# Altium PCB USB-to-UART.PcbDoc
Units mm, origin at the board's own origin, x right, y up, seen from the top; angles counter-clockwise.
Board outline 56.57 x 20 mm, 2 copper layers (Top Layer, Bottom Layer); 24 components, 23 nets, 82 pads, 10 vias.
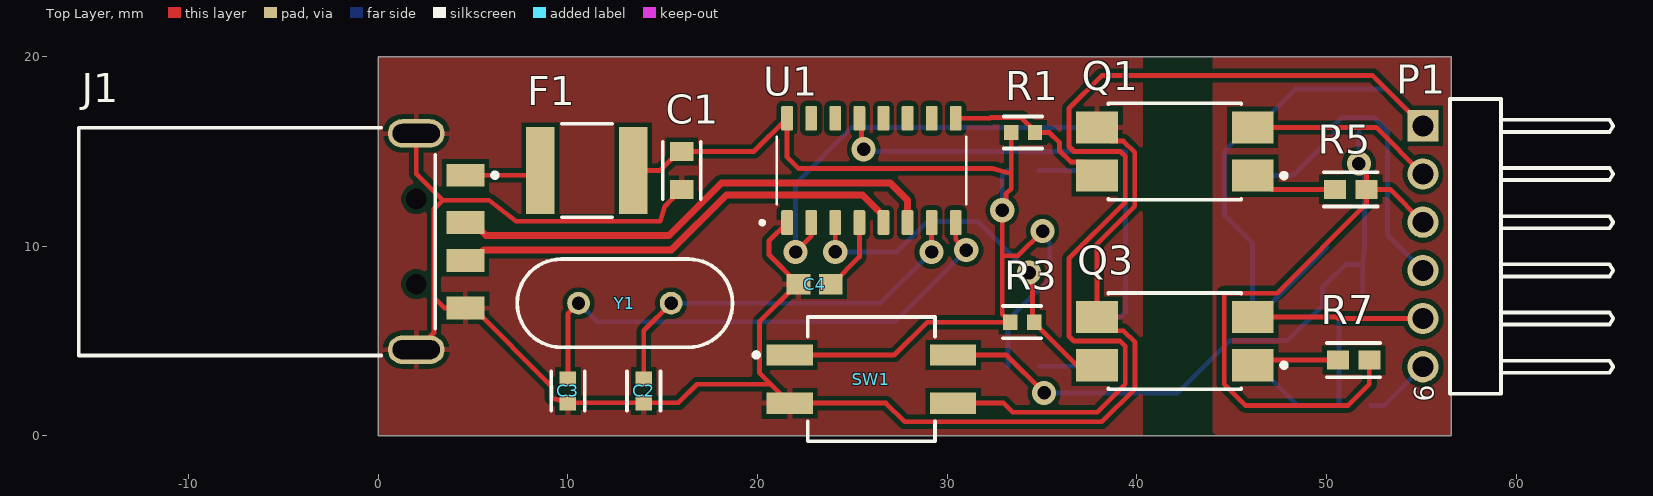
[diagram p0: Top Layer view]
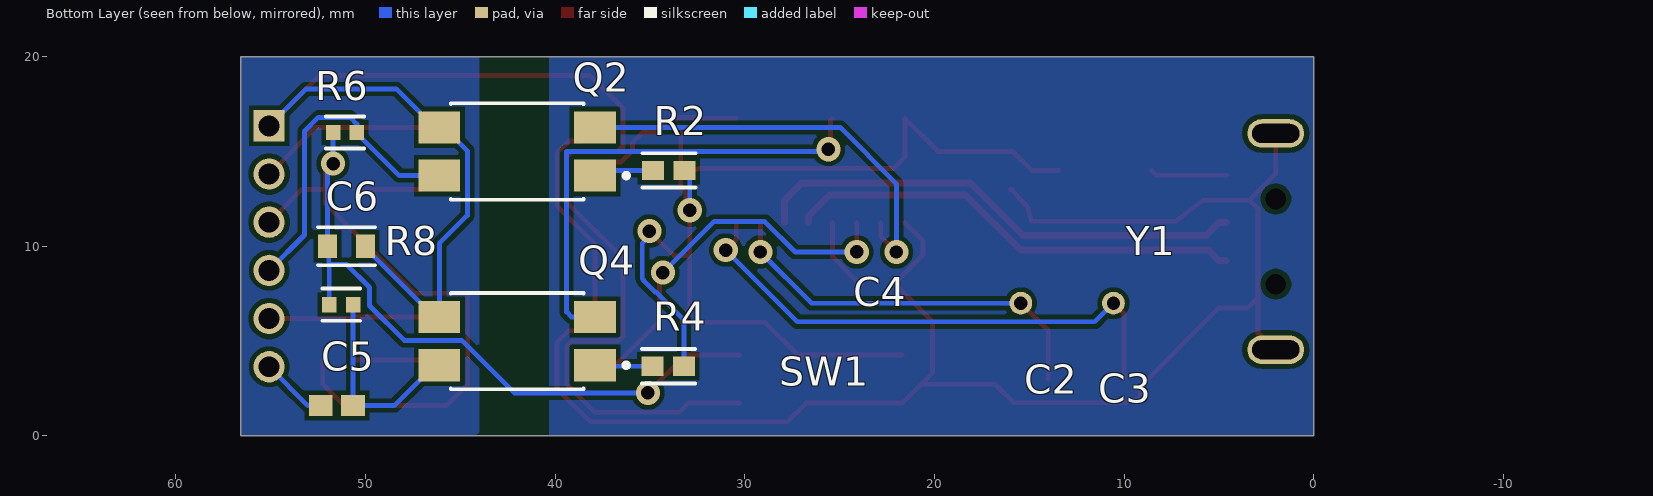
[diagram p1: Bottom Layer view, seen from below]
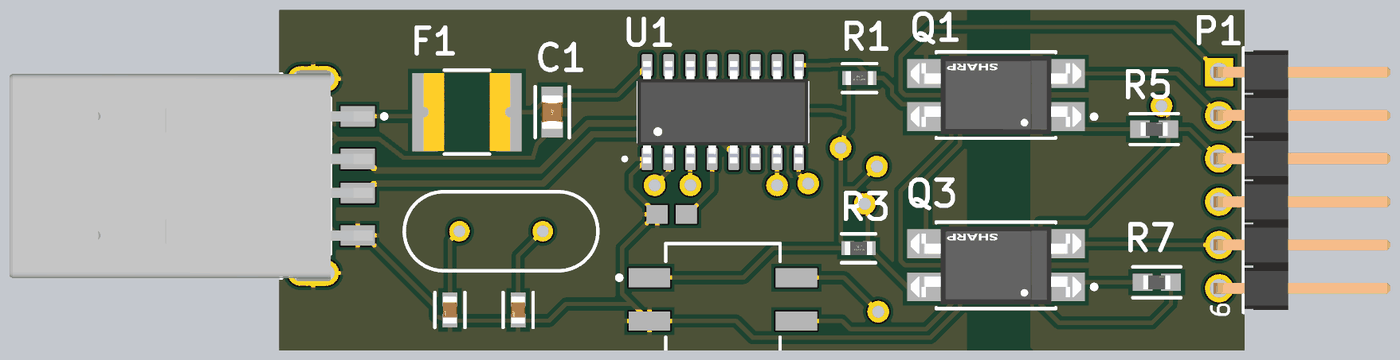
[diagram p2: 3D render of the assembled board from above, using the file's embedded part models]
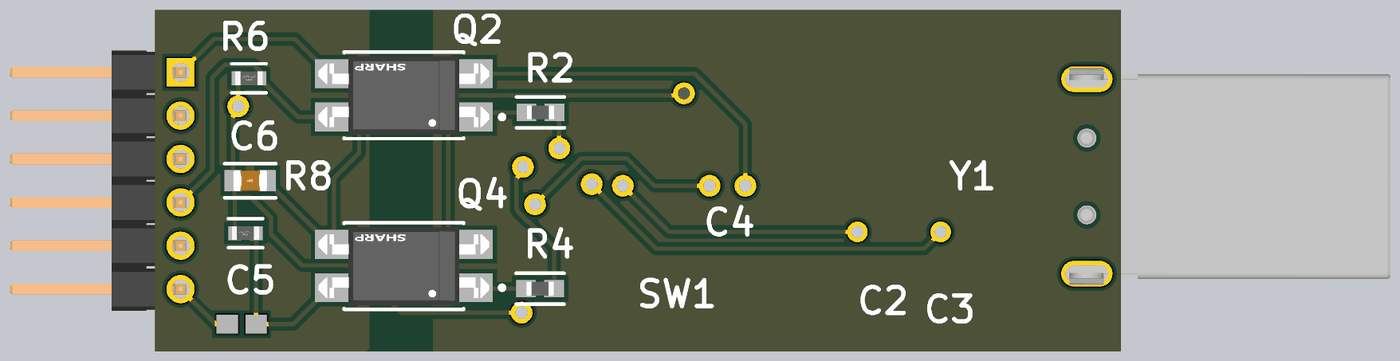
[diagram p3: 3D render of the assembled board from below, using the file's embedded part models]

## Layer stack, top to bottom
Top Solder: solder mask 0.0102, Solder Resist, Dk 3.5
Top Layer: signal copper 0.0356
Dielectric 1: dielectric 0.32, FR-4, Dk 4.8
Bottom Layer: signal copper 0.0356
Bottom Solder: solder mask 0.0102, Solder Resist, Dk 3.5

## Board outline
0,0 56.575,0 56.575,20 0,20

## Design rules (kind name [scope] priority, off if disabled: settings)
Clearance [All] p1: gap=0.254 ignorepadtopadclearanceinfootprint=FALSE except(0: Arc-Hole Track-Hole SMDPad-Hole THPad-Hole Via-Hole Fill-Hole Poly-Hole Region-Hole Text-Hole)
DiffPairsRouting [All] p1: maxlimit=0.254 minlimit=0.254 mostfreqgap=0.254 toplayer_minwidth=0.381 toplayer_maxwidth=0.381 toplayer_prefwidth=0.381 bottomlayer_minwidth=0.381 bottomlayer_maxwidth=0.381 bottomlayer_prefwidth=0.381 maxuncoupledlength=12.7
PolygonConnect [All] p1: connectstyle=Relief reliefconductorwidth=0.254 reliefentries=4 polygonreliefangle="90 Angle" airgapwidth=0.254
RoutingVias [All] p1: holewidth=0.711 width=1.27 viastyle="Through Hole" minholewidth=0.711 minwidth=1.27 maxholewidth=0.711 maxwidth=1.27
SolderMaskExpansion [All] p1: expansion=0.102 istentingtop=FALSE
UnRoutedNet [All] p1: checkbadconnections=TRUE
Width [All] p1: maxlimit=0.254 minlimit=0.254 preferedwidth=0.254
28 further rules are at their usual default settings.

## Classes and differential pairs
differential pair class DIFF_USB: USB_D
differential pair USB_D: +USB_D_P -USB_D_N

## Components (designator, comment, footprint, x,y, rotation, side; value= is the part's Value field where it differs from the comment)
C1 "10uf" FP-0805P-MFG 16,14 r270 top
C2 "22p" FP-0603-L_1_6_0_15-W_0_81-IPC_C 14,2.374 r270 top
C3 "22p" FP-0603-L_1_6_0_15-W_0_81-IPC_C 10,2.374 r270 top
C4 "10n" CAPC1608X90X35ML15T15 23,8 r180 top
C5 "100n" CAPC1608X90X35ML15T15 51.5,1.6 r0 bottom
C6 "10u" FP-0805P-MFG 51,10 r0 bottom
F1 "MF-SMDF050-2" FP-MF-SMDF-MFG 11,14 r0 top value=0.2-1Ω
J1 "480-37-1000" MOLX-480-37-1000_V 3.3,10.25 r270 top
P1 "61300611021" 61300611021 57.85,10 r90 top
Q1 "PC817XNNIP0F" FP-PC817XNNIP0F-MFG 42,15 r180 top
Q2 "PC817XNNIP0F" FP-PC817XNNIP0F-MFG 42,15 r0 bottom
Q3 "PC817XNNIP0F" FP-PC817XNNIP0F-MFG 42,5 r180 top
Q4 "PC817XNNIP0F" FP-PC817XNNIP0F-MFG 42,5 r0 bottom
R1 "10k" FP-CRGP0603-IPC_C 34,16 r0 top value=10KΩ
R2 "510" FP-CR0603-IPC_A 34,14 r0 bottom
R3 "10k" FP-CRGP0603-IPC_C 33.95,6 r0 top value=10KΩ
R4 "510" FP-CR0603-IPC_A 34.025,3.675 r0 bottom
R5 "510" FP-CR0603-IPC_A 51.275,13 r0 top
R6 "10k" FP-CRGP0603-IPC_C 51.075,16 r0 bottom value=10KΩ
R7 "510" FP-CR0603-IPC_A 51.425,4 r0 top
R8 "10k" FP-CRGP0603-IPC_C 51.275,6.925 r0 bottom value=10KΩ
SW1 "219-2LPST" CTS-219-2LPST_V 26,3 r0 top
U1 "CH340G" SOIC127P600X180-16N 26,14 r90 top
Y1 "12M" FOX-FOXSLF-2_V 13,7 r180 top

## Footprints (in the part's own frame and the unit in brackets; to place one, negate y for a bottom-side part, rotate by r counter-clockwise, add the part's x,y. Pads: shape width x height; smd on the part's side, far side on the other; paste and mask are expansions set on the pad)
61300611021 [mm] "Pin Header, pitch 2.54 mm, THT, Angled, single row, 6p"
  rect 1.65x1.65 hole 1.1: 1(6.35,2.77)
  round 1.65 hole 1.1: 2(3.81,2.77) 3(1.27,2.77) 4(-1.27,2.77) 5(-3.81,2.77) 6(-6.35,2.77)
  silkscreen extent -7.77,-7.27 7.77,1.35, body extent -7.62,-7.27 7.62,3.09, height 2.58
CAPC1608X90X35ML15T15 [mm] "Chip Capacitor, 2-Leads, Body 1.60x0.81mm, IPC Low Density"
  rect 1.25x1.1 smd: 1(-0.85,0) 2(0.85,0)
  body extent -0.88,-0.48 0.87,0.48, height 0.9
CTS-219-2LPST_V [mil] "SMD, 4-Leads, Body 6.706x6.553mm, Pitch 2.54mm"
  rect 96x44 smd: 1(-169.5,50) 2(-169.5,-50) 3(169.5,-50) 4(169.5,50)
  silkscreen extent -244,-129 132,129, body extent -132,-129 132,129, height 163
FOX-FOXSLF-2_V [mm] "THD, 2-Leads, Body 11.35x4.65mm, Pitch 4.88mm"
  round 1.2 hole 0.7: 1(-2.44,0) 2(2.44,0)
  silkscreen extent -5.68,-2.32 5.68,2.32, body extent -5.67,-2.32 5.68,2.32, height 3.6
FP-0603-L_1_6_0_15-W_0_81-IPC_C [mm]
  rect 0.807x0.868 smd paste+0 mask+0: 1(-0.626,0) 2(0.626,0)
  silkscreen extent -1.03,-0.88 1.03,0.88, body extent -1.13,-0.58 1.13,0.58, height 0.25
FP-0805P-MFG [mm]
  rect 1x1.25 smd paste+0 mask+0: 1(-1,0) 2(1,0)
  silkscreen extent -1.5,-1 1.5,1, body extent -1.6,-0.82 1.6,0.82, height 0.25
FP-CR0603-IPC_A [mm]
  rect 1.158x1.012 smd paste+0 mask+0: 1(-0.827,0) 2(0.827,0)
  silkscreen extent -1.41,-0.91 1.41,0.91, body extent -0.8,-0.4 0.8,0.4, height 0.55
FP-CRGP0603-IPC_C [mm]
  rect 0.758x0.812 smd paste+0 mask+0: 1(-0.627,0) 2(0.627,0)
  silkscreen extent -1.01,-0.85 1.01,0.85, body extent -1.11,-0.55 1.11,0.55, height 0.25
FP-MF-SMDF-MFG [mm]
  rect 1.5x4.6 smd paste+0 mask+0: 1(-2.45,0) 2(2.45,0)
  silkscreen extent -1.32,-2.47 1.32,2.46, body extent -3.3,-2.57 3.3,2.57, height 0.25
FP-PC817XNNIP0F-MFG [mm]
  rect 2.2x1.7 smd paste+0 mask+0: 1(-4.1,1.27) 2(-4.1,-1.27) 3(4.1,-1.27) 4(4.1,1.27)
  silkscreen extent -5.88,-2.54 3.5,2.54, body extent -5,-2.29 5,2.29, height 4.6
MOLX-480-37-1000_V [mm] "CONN, 4-Leads, Body 12x18.8mm"
  rect 1.2x2 smd: 1(-3.5,1.3) 2(-1,1.3) 3(1,1.3) 4(3.5,1.3)
  oval 1.5x3 hole 1 slot 2.5 at 90 deg: 5(-5.7,-1.3) 6(5.7,-1.3)
  round 0.5 hole 1.1 unplated: MH1(-2.25,-1.3) MH2(2.25,-1.3)
  silkscreen extent -6,-19.1 6,2.98, body extent -6.35,-19.08 6.35,2.2, height 3.07
SOIC127P600X180-16N [mm]
  rrect25% 1.31x0.62 smd: 1(-2.75,4.445) 2(-2.75,3.175) 3(-2.75,1.905) 4(-2.75,0.635) 5(-2.75,-0.635) 6(-2.75,-1.905) 7(-2.75,-3.175) 8(-2.75,-4.445) 9(2.75,-4.445) 10(2.75,-3.175) 11(2.75,-1.905) 12(2.75,-0.635) 13(2.75,0.635) 14(2.75,1.905) 15(2.75,3.175) 16(2.75,4.445)
  silkscreen extent -2.85,-5 1.78,5.85, body extent -3,-5 3,5, height 1.8

## Part data
C1 C6: library part CMP-2007-04802-2, "CAP CER 10UF 25V X5R 0805", Capacitance=10uF, Case Code (Imperial)=0805, Case Code (Metric)=2012, Dielectric=X5R, Max Operating Temperature=85°C, Min Operating Temperature=-55°C, Package Quantity=1, Tolerance=10%, Voltage Rating=25V, Case/Package=0805, Construction=Flat, Contact Plating=Tin, Depth=1.25mm, Height=1.4mm, Lead Free="Lead Free", Length=2.01mm, Mount="Surface Mount", Number of Pins=2, Packaging="Tape and Reel", Radiation Hardening=No, REACH SVHC="No SVHC", RoHS Compliant=Yes, Series=-, Termination=SMD/SMT, Thickness=0.051inch, Voltage Rating (DC)=25V, Width=0.049inch
C2 C3: library part CMP-2006-04207-3, "General Purpose Ceramic Capacitor, 0603, 22pF, 5%, NP0, 30ppm/°C, 50V", Capacitance=22pF, Case Code (Imperial)=0603, Case Code (Metric)=1608, Dielectric=C0G, Dielectric Material=Ceramic, Insulation Resistance=100GR, Max Operating Temperature=125°C, Min Operating Temperature=-55°C, Package Quantity=1, Temperature Coefficient=30ppm/°C, Tolerance=5%, Voltage=50V, Case/Package=0603, Contact Plating=Tin, Depth=0.81mm, Height=0.63mm, Lead Free="Lead Free", Length=1.6mm, Mount="Surface Mount", Number of Pins=2, Packaging="Tape and Reel", Radiation Hardening=No, REACH SVHC="No SVHC", RoHS Compliant=Yes, Termination=SMD/SMT, Thickness=0.035inch, Voltage Rating=50V, Voltage Rating (DC)=50V, Width=0.81mm
C4: library part CMP-2006-04154-1, Manufacturer="AVX Interconnect / Elco", Part Number=06033C103JAT2A
C5: library part CMP-2006-04392-1, Manufacturer="AVX Interconnect / Elco", Part Number=06035C104MAT2A
F1: library part CMP-07400-000008-1, "PTC RESET FUSE 60V 550MA 2018", Ambient Temperature Range High=+85°C, Ambient Temperature Range Low=-40°C, Current Rating=10A, Hold Current=0.55A, Manufacturer="Bourns Inc.", Package=MF-SMDF, Resistance=0.2-1Ω, Temperature="-40°C to +85°C", Trip Current=1.2A, Voltage Rating=60V, Automotive=No, Category=Fuse, ComponentLink2Description=Datasheet, ComponentLink2URL=https://bourns.com/data/global/pdfs/MFSMDF.pdf, Device Class L1="Circuit Protection", Device Class L2="PTC Resettable Fuses", Device Class L3=unset, Digikey Description="PTC RESET FUSE 60V 550MA 2018", Height=1.09mm, Lead Free=Yes, Manufacturer Part Number=MF-SMDF050-2, Mouser Description="Resettable Fuses - PPTC 0.55A 60V 0.2ohm Hold 0.55A Trip1.2a", Octopart=https://octopart.com/mf-smdf050-2-bourns-94955, RoHS=TRUE, Temperature Range High=+85°C, Temperature Range Low=-40°C, Trip Time=3s
J1: library part CMP-1676-00005-1, "Universal Serial Bus (USB) Shielded I/O Plug, Type A, Right Angle Connector, 1.5 A, -20 to 85 degC, 4-Pin SMD, RoHS, Tray", Case Code (Imperial)=0603, Case Code (Metric)=1608, Max Operating Temperature="155 degC", Min Operating Temperature="-55 degC", Package Quantity=5000, Power Rating="100 mW", Resistance="1 mohm", Tolerance=1%, Voltage Rating="50 V", Case\Package=0603, ComponentLink1Description="Manufacturer URL", ComponentLink1URL=http://www.molex.com/, ComponentLink2Description=Datasheet, ComponentLink2URL=http://www.molex.com/pdm_docs/sd/480371000_sd.pdf, DatasheetVersion="Rev. D, 06/2004", Height="0.45 mm", Length="1.6 mm", Mount="Surface Mount", PackageDescription="4-Pin Surface Mount Device, Body 12 x 18.8 mm", PackageReference=480-37-1000, Packaging="Tape and Reel", Pins=2, REACH SVHC="No SVHC", RoHSCompliant=true, Voltage Rating (DC)="50 V", Width="0.8 mm"
P1: library part CMP-1502-01069-1, "THT Angled Pin Header WR-PHD, Pitch 2.54 mm, Single Row, 6 pins", Contact Resistance=20mOhm, Manufacturer="Wurth Elektronik", Operating Temperature=-40to105degC, Rated Current=3A, Withstanding Voltage=500VAC, Working Voltage=250VAC, Datasheet URL=https://katalog.we-online.de/em/datasheet/6130xx11021.pdf, Gender=Male, Manufacturer URL=http://www.we-online.de, Mounting Technology=THT, Orientation=Angled, Package Reference=61300611021, Packaging=Bag, Part Number=61300611021, Pin Number=6, Pitch=2.54mm, Publisher=WurthElektronik, Row Number=Single
Q1 Q2 Q3 Q4: library part CMP-65434-000005-1, "OPTOISOLATOR 5KV TRANS 4SMD", Case/Package=SMD/SMT, Collector Emitter Saturation Voltage=200mV, Collector Emitter Voltage (VCEO)=80V, Forward Current=50mA, Forward Voltage=1.4V, Isolation Voltage=5kV, Max Operating Temperature=100°C, Max Power Dissipation=200mW, Min Operating Temperature=-30°C, Output Current per Channel=30mA, Package Quantity=2000, Reverse Breakdown Voltage=6V, Collector-emitter Voltage-Max=200mV, Contact Plating=Copper, Fall Time=18000ns, Input Current=50mA, Input Type=DC, Isolation Voltage-Max=5kV, Lead Free="Lead Free", Max Collector Current=50mA, Max Input Current=50mA, Max Output Voltage=80V, Mount="Surface Mount", Number of Channels=1, Number of Elements=1, Number of Pins=4, Output Voltage=80V, Packaging="Tape and Reel", Power Dissipation=200mW, Radiation Hardening=No, Rise Time=18000ns, RoHS Compliant=Yes
R1 R3 R6 R8: library part CMP-03211-004414-1, "CRGP 0603 10K 1%", Ambient Temperature Range High=+70°C, Manufacturer=TE, Manufacturer Part Number=CRGP0603F10K, Package=CRGP0603, Power Rating=0.25W, Resistance=10KΩ, Temperature="-55°C to +155°C", Temperature Coefficient=±100ppm/°C, Temperature Range High=+155°C, Temperature Range Low=-55°C, Tolerance=0.01, Voltage Rating=50V, Automotive=No, Category=Res, ComponentLink2Description=Datasheet, ComponentLink2URL=https://www.te.com/commerce/DocumentDelivery/DDEController?Action=srchrtrv&DocNm=9-1773463-9&DocType=DS&DocLang=English, Composition="Thick Film", Device Class L1="Passive Components", Device Class L2=Resistors, Device Class L3="Chip SMD Resistors", Digikey Description="CRGP 0603 10K 1%", Height=0.55mm, Ipc Land Pattern Name=RESC16080X45, Lead Free=Yes, Mouser Description="Res, 10K, 1%, 0.25W, 0603, Thick Film", Octopart=https://octopart.com/crgp0603f10k-te+connectivity-91018721, RoHS=TRUE, Series=CRGP
R2 R4 R5 R7: library part CMP-07231-001773-1, "Thick Film Chip Resistors 0603 510Ω 0.1W 1% 100ppm/°C", Case Code (Imperial)=0603, Case Code (Metric)=1608, Max Operating Temperature=155°C, Min Operating Temperature=-55°C, Package Quantity=5000, Power Rating=100mW, Resistance=510R, Temperature Coefficient=100ppm/°C, Tolerance=1%, Voltage Rating=50V, Case/Package=0603, Composition="Thick Film", Contact Plating=Tin, Height=0.45mm, Length=1.6mm, Mount="Surface Mount", Packaging="Tape and Reel", Radiation Hardening=No, Termination=SMD/SMT, Thickness=457um, Width=0.8mm
SW1: library part CMP-2000-05532-1, "Surface Mount DIP Switch Auto Placeable, -55 to 85 degC, 4-Pin SMD, RoHS, Tube", Manufacturer="CTS Corporation", Package Description="4-Pin Surface Mount Device, Body 6.7 x 6.55 mm", Actuator Style=LowProfile, Circuitry=SPST, Datasheet URL=http://www.ctscorp.com/wp-content/uploads/2016/01/219-Dec-30-2008.pdf, Datasheet Version=12/2008, Manufacturer URL=http://www.ctscorp.com/, Mounting Technology=SurfaceMount, No of Positions=2, Package Reference=219-2LPST, Sealed Option=Sealed, Termination Style=GullWing, Type=Dip
U1: "USB Interface Integrated Circuit", Package=None, Availability="Not in stock", Check_prices=https://www.snapeda.com/parts/Ch340G/WCH/view-part/?ref=eda, MF=WCH, MP=Ch340G, Price=None, SnapEDA_Link=https://www.snapeda.com/parts/Ch340G/WCH/view-part/?ref=snap
Y1: library part CMP-1749-00004-1, "Resistance Weld Thru-Hole Crystal, 12 MHz, +/-30 ppm, -20 to 70 degC, 2-Pin THD, RoHS, Bulk", Case\Package=TO-251-3, Input Capacitance="350 pF", Max Operating Temperature="150 degC", Max Power Dissipation="2.5 W", Min Operating Temperature="-55 degC", Package Quantity=70, ComponentLink1Description="Manufacturer URL", ComponentLink1URL=http://www.foxonline.com/, ComponentLink2Description=Datasheet, ComponentLink2URL=http://www.foxonline.com/pdfs/hc49slf.pdf, DatasheetVersion=Mar-15, Elements=1, Height="6.1 mm", Length="6.6 mm", Mount="Through Hole", PackageDescription="2-Pin Through Hole Device, Body 11.35 x 4.65 mm, Pitch 4.88 mm", PackageReference=FOXSLF-2, Packaging=Rail/Tube, Pins=3, Radiation Hardening=No, Rds On Max="115 mohm", REACH SVHC="No SVHC", RoHSCompliant=true, Typical Rise Time="90 ns", Width="2.3 mm"

## Via types
v1: diameter 1.27, hole 0.711, Top Layer to Bottom Layer, 10 vias

## Nets (pads, with @x,y where several pads share a name; then routed paths per layer and width w, separated by ;. In a path a pad name is that pad's centre, name@x,y a point inside that pad or via, vN(x,y) a via of type N, cw(c..) or ccw(c..) an arc to the next point about the centre after c; other vN are vias at no path point)
+5: C1.1 F1.2 R1.1 R2.1 R3.1 R4.1 SW1.1 U1.16 | length 59.2
  Top Layer w0.254: F1.2 14.875,14 15.875,15 C1.1 19.805,15 U1.16 21.555,14.706 22.161,14.1 32.394,14.1 33.373,13.828 ; SW1.1 27.203,4.27 28.933,6 R3.1 33.323,6.027 33.071,6.279 33.049,6.279 32.9,6.428 32.9,9.5 ; R1.1 33.373,13.828 ; v1(35.027,10.803) 33.723,9.5 32.9,9.5 ; 32.9,9.5 v1(32.9,11.9) 33.094,12.094 33.094,12.764 33.373,13.043 33.373,13.828
  Bottom Layer w0.254: v1(32.9,11.9) 32.9,13.727 R2.1 ; R4.1 33.198,6.098 34.697,7.597 34.737,7.597 35.332,8.192 35.332,8.232 35.4,8.3 35.4,10.155 35.027,10.528 v1(35.027,10.803)
CTS: Q1.4 R1.2 U1.9 | length 9
  Top Layer w0.254: U1.9 32.25,16.75 32.287,16.787 33.91,16.787 34.627,16.07 R1.2 35.387,16 35.911,15.476 35.911,15.052 36.51,14.453 37.177,14.453 Q1.4
DTR: Q4.2 U1.13 | length 25.6
  Top Layer w0.254: U1.13 25.479,16.636 25.479,15.23 v1(25.594,15.116)
  Bottom Layer w0.254: v1(25.594,15.116) 25.713,14.996 39.395,14.996 39.395,6.538 39.127,6.27 Q4.2
GND: C1.2 C2.2 C3.2 C4.2 J1.4 J1.5 J1.6 Q1.3 Q3.3 SW1.2 U1.1 | length 95.8
  Top Layer w0.254: J1.6 2.047,4.55 2.931,5.434 2.931,7.3 ; J1.5 2,13.817 3.39,12.427 ; C1.2 15.875,13 15.502,12.502 15.1,12.1 14.87,11.319 7.281,11.319 5.841,12.427 3.39,12.427 ; U1.1 20.6,10.295 20.6,9.55 C4.2 22.075,8 20.094,6.02 20.094,3.33 20.697,2.728 ; Q1.3 38.623,15.547 39.29,15.547 39.889,14.948 39.889,12.114 37.9,10.125 Q3.3 38.623,5.547 39.29,5.547 39.9,4.937 39.9,2.5 38.147,0.747 27.748,0.747 26.765,1.73 SW1.2 20.697,2.728 ; 2.931,7.3 2.931,11.968 3.39,12.427 ; 2.931,7.3 3.481,6.75 J1.4 5,6.75 9.144,2.606 9.144,2.002 C3.2 C2.2 15.823,1.748 16.803,2.728 20.697,2.728
GNDIO: C6.1 P1.1 Q2.3 Q4.3 SW1.3 | length 78.9
  Top Layer w0.254: SW1.3 32.97,1.73 33.445,1.255 37.914,1.255 39.381,2.722 39.381,4.738 39.119,5 36.681,5 36.419,5.262 36.419,9.362 39.381,12.324 39.381,14.738 39.119,15 36.681,15 36.419,15.262 36.419,17.278 38.141,19 52.43,19 P1.1
  Bottom Layer w0.254: C6.1 50,9.92 46.35,6.27 Q4.3 46.1,10.15 44.619,11.632 44.619,15.039 45.85,16.27 Q2.3 46.35,16.27 48.38,18.3 53.13,18.3 P1.1
MCU_XI: C2.1 U1.7 Y1.1 | length 21
  Top Layer w0.254: C2.1 14,5.56 Y1.1 ; v1(29.175,9.7) U1.7
  Bottom Layer w0.254: Y1.1 26.475,7 v1(29.175,9.7)
MCU_XO: C3.1 U1.8 Y1.2 | length 28.3
  Top Layer w0.254: C3.1 10,6.44 Y1.2 ; U1.8 30.445,10.355 v1(31,9.8)
  Bottom Layer w0.254: Y1.2 11.541,6.019 27.219,6.019 v1(31,9.8)
NetC4_1: C4.1 U1.4 | length 3.9
  Top Layer w0.254: C4.1 23.925,8 25.365,9.44 U1.4
NetC5_1: C5.1 Q4.4 R8.1 | length 10.8
  Bottom Layer w0.254: Q4.4 46.35,3.73 48.48,1.6 C5.1 50.648,1.602 R8.1
NetC5_2: C5.2 P1.6 | length 3.6
  Bottom Layer w0.254: C5.2 53.03,1.6 P1.6
NetF1_1: F1.1 J1.1 | length 4.1
  Top Layer w0.254: J1.1 8.3,13.75 F1.1
NetP1_2: P1.2 Q1.2 | length 10
  Top Layer w0.254: Q1.2 52.62,16.27 P1.2
NetP1_4: P1.4 Q2.4 R6.1 | length 17.1
  Bottom Layer w0.254: Q2.4 48.205,13.73 50.448,15.973 R6.1 50.448,16.448 50.8,16.8 52.476,16.8 53.213,16.063 53.213,10.597 P1.4
NetP1_5: P1.5 Q3.2 | length 9
  Top Layer w0.254: Q3.2 50.546,6.27 50.626,6.19 P1.5
NetQ1_1: Q1.1 R5.1 | length 4.7
  Top Layer w0.254: Q1.1 46.35,13.73 47.08,13 R5.1
NetQ2_1: Q2.1 R2.2 | length 3.2
  Bottom Layer w0.254: R2.2 37.63,14 Q2.1
NetQ3_1: Q3.1 R7.1 | length 4.6
  Top Layer w0.254: Q3.1 46.37,4 R7.1
NetQ4_1: Q4.1 R4.2 | length 3.1
  Bottom Layer w0.254: R4.2 37.845,3.675 Q4.1
RXD: Q3.4 R3.2 U1.3 | length 20.6
  Top Layer w0.254: v1(24.095,9.705) U1.3 ; v1(34.316,8.613) 34.5,8.429 34.5,6.05 R3.2@34.577,5.973 ; R3.2 R3.2@34.577,5.973 ; Q3.4 36.82,3.73 R3.2@34.577,5.973
  Bottom Layer w0.254: v1(24.095,9.705) 24.1,9.7 27.34,9.7 28.94,11.3 31.629,11.3 v1(34.316,8.613)
TXD: Q2.2 U1.2 | length 22.6
  Top Layer w0.254: v1(22,9.7) 22.825,10.525 U1.2
  Bottom Layer w0.254: v1(22,9.7) 22,13.297 24.973,16.27 Q2.2
USB_D_N: J1.2 U1.6 | length 26.3
  Top Layer w0.381: J1.2 5,11.25 5.682,10.568 15.321,10.568 18.093,13.339 26.992,13.339 27.905,12.426 U1.6
USB_D_P: J1.3 U1.5 | length 24.3
  Top Layer w0.381: J1.3 5,9.25 5.55,9.8 15.452,9.8 18.356,12.704 25.526,12.704 26.635,11.595 U1.5
VCC: C6.2 P1.3 R5.2 R6.2 R7.2 R8.2 SW1.4 | length 65.1
  Top Layer w0.254: SW1.4 33.104,4.27 v1(35.103,2.271) ; v1(51.702,14.361) 52.102,13.961 R5.2 ; R7.2 52.252,2.728 51.134,1.61 45.72,1.61 44.602,2.728 44.602,7.529 47.39,7.529 52.102,12.241 R5.2 ; P1.3 53.35,13 R5.2
  Bottom Layer w0.254: v1(35.103,2.271) 42.152,2.271 44.92,5.039 47.953,5.039 49.784,6.87 49.784,7.833 50.984,9.033 51.902,9.033 ; R6.2 v1(51.702,14.361) 52,14.063 C6.2 51.902,9.033 ; R8.2 51.902,9.033
pads on no net: J1.MH1 J1.MH2 U1.10 U1.11 U1.12 U1.14 U1.15

## Polygon pours and split planes (outlines as drawn)
GND on Top Layer "GND_L01_P003" (solid, pour order 3): 56.6,0 44.2,0 44,0.2 44,20 56.6,20
GND on Top Layer "GND_L01_P002" (solid, pour order 2): 0,0 40.3,0 40.3,20 0,20
GND on Bottom Layer "GND_L02_P005" (solid, pour order 5): 56.6,0 44.2,0 44,0.2 44,20 56.6,20
GNDIO on Bottom Layer "GNDIO_L02_P004" (solid, pour order 4): 0,0 40.3,0 40.3,20 0,20

## Text inside footprints (layer, text, board x,y; h text height)
J1: Mechanical 1 "PCB EDGE" at -0.54,8.98 h0.5 r270
P1: Top Overlay "6" at 55.65,1.81 h1.02 r90